# Altium PCB PCB_C70005-A2.PcbDoc (part 3 of 3)
Units mm, origin at the board's own origin, x right, y up, seen from the top; angles counter-clockwise.
Board outline 80.01 x 50.8 mm, 2 copper layers (Top Layer, Bottom Layer); 96 components, 58 nets, 254 pads, 376 vias.
Unrouted connection lines stored in the file: 49.
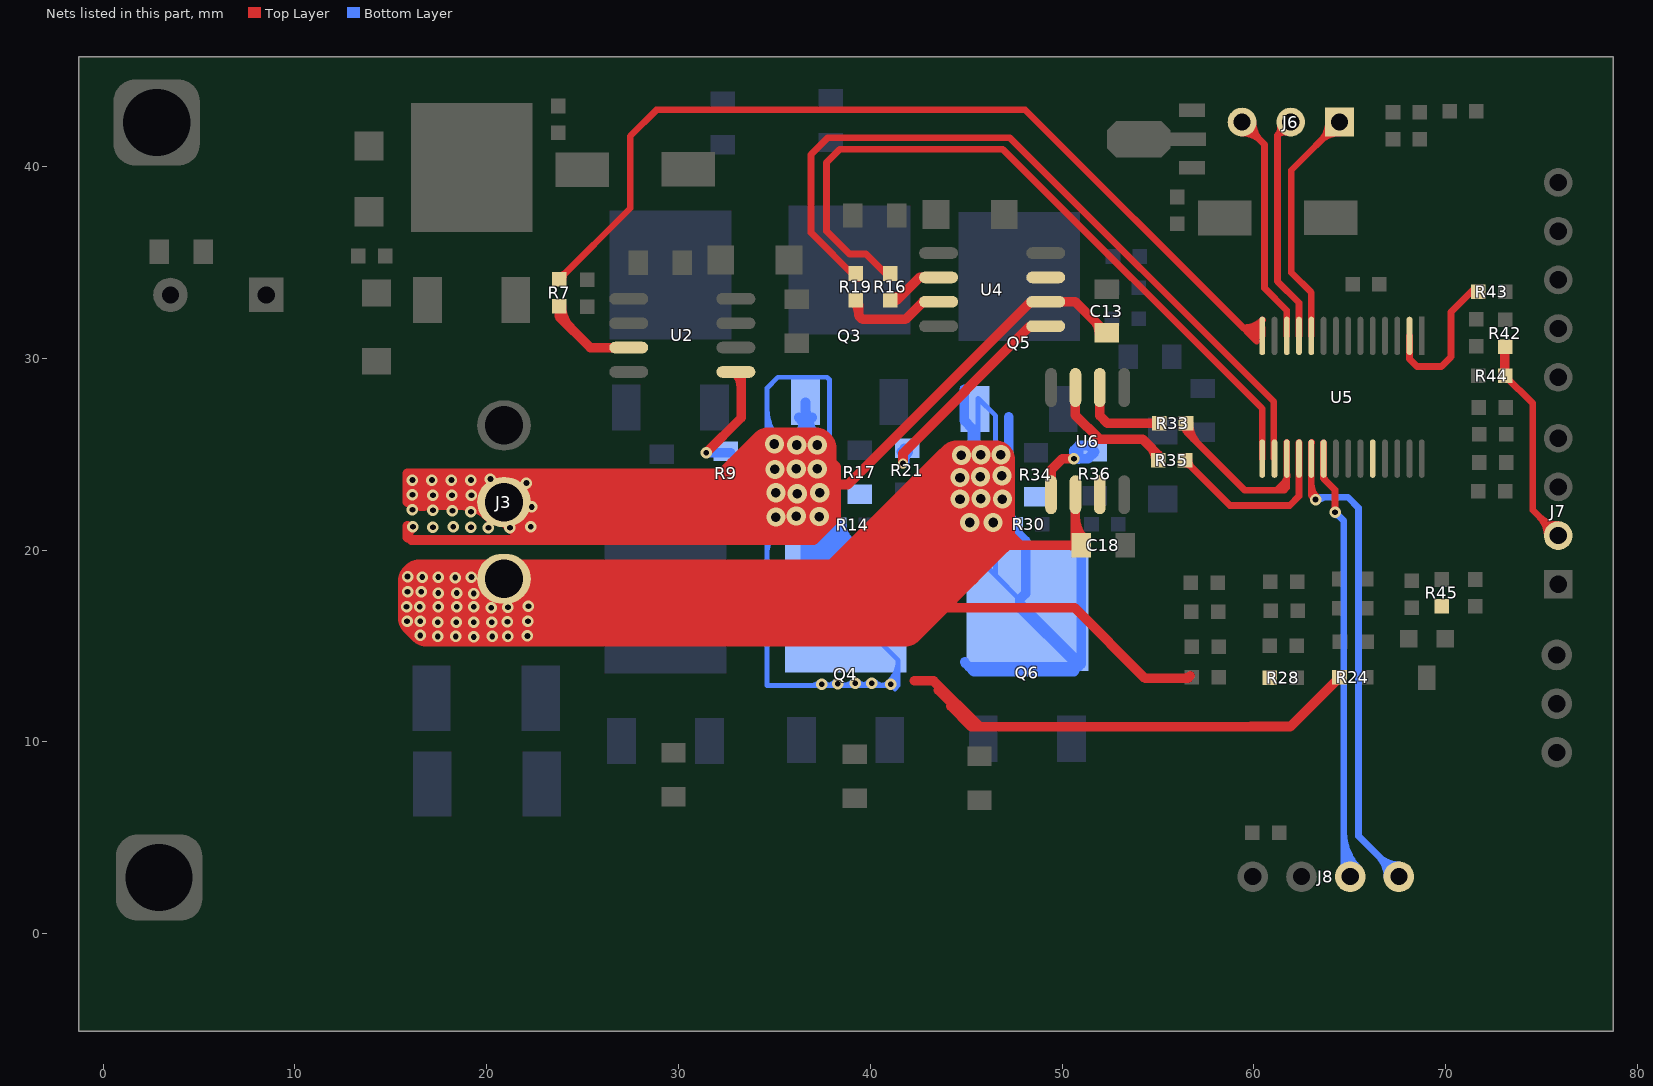
[diagram p3: the nets of this part, all layers, seen from the top]

## Via types
v1: diameter 0.6, hole 0.3, Top Layer to Bottom Layer, 247 vias
v2: diameter 1, hole 0.5, Top Layer to Bottom Layer, 69 vias
v3: diameter 0.5, hole 0.3, Top Layer to Bottom Layer, 60 vias

## Nets (pads, with @x,y where several pads share a name; then routed paths per layer and width w, separated by ;. In a path a pad name is that pad's centre, name@x,y a point inside that pad or via, vN(x,y) a via of type N, cw(c..) or ccw(c..) an arc to the next point about the centre after c; other vN are vias at no path point) (continued)
NetR7_1: R7.1 U5.14 | length 52.2
  Top Layer w0.35: R7.1@23.774,34.112 27.483,37.821 27.483,41.58 28.854,42.951 48.082,42.951 59.436,31.598 ; R7.1@23.774,34.318 ccw(c23.774,34.816) 24.126,34.464 ccw(c24.478,34.112) R7.1@23.98,34.112 ; 59.489,31.598 ccw(c59.489,32.965) U5.14@60.455,31.998 ; 60.12,31.483 59.55,31.483 ; 60.147,30.886 59.868,31.166 ; 60.235,31.369 59.665,31.369 ; U5.14@60.427,31.598 59.436,31.598 ; U5.14@60.438,31.586 U5.14@60.438,31.166 59.868,31.166 ; 59.436,31.598 59.55,31.483 ; 59.55,31.483 59.665,31.369 ; 59.665,31.369 59.868,31.166
NetR7_2: R7.2 U2.3 | length 6.1
  Top Layer w0.5: R7.2@23.774,32.715 23.774,32.182 25.4,30.556 U2.3@27.407,30.556 ; R7.2@23.905,32.715 ccw(c25.509,32.715) 24.375,31.581
NetR9_1: R9.1 U2.5 | length 7.2
  Top Layer w0.5: v1(31.445,25.07) 33.274,26.899 33.274,29.007 U2.5@32.995,29.286 ; U2.5@32.956,29.247 cw(c32.188,28.479) 33.274,28.479
  Bottom Layer w0.5: v1(31.445,25.07) R9.1@32.715,25.07
NetR16_1: R16.1 U5.15 | length 39.1
  Top Layer w0.35: R16.1@41.046,34.163 39.776,35.433 38.913,35.433 37.719,36.627 37.719,40.208 38.405,40.894 46.914,40.894 60.438,27.37 U5.15@60.438,24.766
NetR16_2: R16.2 U4.2 | length 4.2
  Top Layer w0.5: R16.2@41.046,33.151 ccw(c41.046,34.268) 41.836,33.478 ; R16.2@41.313,33.033 41.391,33.033 42.572,34.214 U4.2@43.562,34.214 U4.2@44.146,34.214
NetR17_1: R17.1 U4.7
NetR19_1: R19.1 U5.16 | length 40.7
  Top Layer w0.35: R19.1@39.395,34.188 39.268,34.188 36.906,36.551 36.906,40.615 37.795,41.504 47.269,41.504 61.042,27.731 U5.16@61.042,24.802
NetR19_2: R19.2 U4.3 | length 6.4
  Top Layer w0.5: R19.2@39.15,32.927 cw(c38.559,32.336) 39.395,32.336 ; R19.2@39.395,32.791 39.395,32.233 39.599,32.029 41.834,32.029 42.748,32.944 U4.3@43.561,32.944 U4.3@44.145,32.944
NetR21_1: R21.1 U4.5 | length 14.5
  Top Layer w0.5: v3(41.707,24.511) 41.707,25.044 48.336,31.674 U4.5@49.149,31.674 U4.5@49.733,31.674
  Bottom Layer w0.5: R21.1@41.626,25.116 cw(c41.247,24.737) v3@41.783,24.737 ; v3@41.707,24.505 cw(c42.505,24.505) R21.1@41.979,25.104 ; v3(41.707,24.511) 41.707,25.07 41.783,25.298 v3@41.783,24.562 ; v3@41.783,24.614 cw(c42.493,24.614) R21.1@41.991,25.116
NetR33_1: R33.1 U5.17 | length 12.5
  Top Layer w0.35: R33.1@56.32,26.619 ccw(c57.015,26.619) 56.524,26.128 ; R33.1@56.348,26.449 cw(c56.134,26.134) 56.515,26.134 ; R33.1@56.515,26.391 56.515,26.137 59.538,23.114 61.184,23.114 ; R33.1@56.67,26.619 ccw(c58.21,26.619) 57.121,25.53 ; 61.571,23.5 ccw(c61.155,23.916) U5.17@61.743,23.916 ; U5.17@61.722,25.603 61.718,25.599 U5.17@61.718,24.766 61.718,23.647 ; 61.184,23.114 61.718,23.647 ; 61.184,23.114 61.57,23.114 61.718,23.262 61.718,23.647
NetR33_2: R33.2 U6.2 | length 4.7
  Top Layer w0.5: U6.2@51.968,28.473 51.968,27 52.349,26.619 R33.2@55.067,26.619
NetR34_1: R34.1 U6.7
NetR35_1: R35.1 U5.18 | length 10.7
  Top Layer w0.35: R35.1@56.413,24.483 cw(c56.413,24.047) R35.1@56.722,24.355 ; R35.1@56.413,24.663 58.75,22.327 61.874,22.327 62.358,22.81 U5.18@62.358,24.766 U5.18@62.358,25.602 ; R35.1@56.619,24.689 ccw(c57.178,24.689) 56.783,24.294
NetR35_2: R35.2 U6.3 | length 7.4
  Top Layer w0.5: U6.3@50.698,28.473 50.698,27.026 51.943,25.781 54.204,25.781 R35.2@55.016,24.968 ; 54.595,25.389 cw(c53.895,24.689) R35.2@54.885,24.689
NetR36_1: R36.1 U6.5 | length 6.4
  Top Layer w0.5: U6.5@49.428,22.885 49.428,24.181 50.013,24.765 v1(50.622,24.765)
  Bottom Layer w0.5: v1@50.876,24.74 v1@50.876,24.765 ; v1@50.876,24.765 50.876,25.451 ; v1@50.876,24.765 51.359,24.765 R36.1@51.714,25.121 51.384,25.451 50.876,25.451 ; v1@50.876,24.765 v1(50.622,24.765) 50.622,25.197 50.876,25.451
NetR43_2: R43.2 U5.2 | length 7.8
  Top Layer w0.35: U5.2@68.118,31.166 68.118,29.957 68.504,29.571 69.779,29.571 70.282,30.074 70.282,32.41 R43.2@71.526,33.655
NetR45_1: R45.1 U5.24
OCDSCL: J8.2 U5.20 | length 27.9
  Top Layer w0.35: U5.20@63.613,23.916 ccw(c63.984,23.916) 63.722,23.653 ; U5.20@63.627,25.578 63.638,25.567 U5.20@63.638,24.766 63.638,23.737 64.237,23.138 v1(64.237,21.971) ; v1@64.148,22.059 ccw(c63.935,22.273) 64.237,22.273 ccw(c64.538,22.273) v1@64.325,22.059
  Bottom Layer w0.35: v1@64.237,21.846 cw(c64.237,21.544) 64.45,21.758 cw(c64.663,21.971) v1@64.362,21.971 ; v1(64.237,21.971) 64.694,21.514 64.694,3.302 J8.2@65.024,2.972 ; 64.694,4.433 ccw(c66.485,4.433) J8.2@65.218,3.166 ; 64.694,5.278 ccw(c67.33,5.278) J8.2@65.466,3.414
OCDSDA: J8.1 U5.19 | length 29.9
  Top Layer w0.35: 62.998,23.471 ccw(c64.06,23.471) v1@63.309,22.72 ; U5.19@63.017,25.603 62.998,25.584 U5.19@62.998,24.766 62.998,22.854 v1@63.195,22.657 ; v1@63.096,22.631 ccw(c62.794,22.631) 63.007,22.845 ccw(c63.221,23.058) v1@63.221,22.756
  Bottom Layer w0.35: v1(63.221,22.631) 63.348,22.758 64.897,22.758 65.456,22.2 65.456,5.08 J8.1@67.564,2.972 ; v1@63.309,22.543 cw(c63.829,22.023) 63.829,22.758 ; J8.1@66.939,2.972 ccw(c65.43,2.972) 66.497,4.039 ccw(c67.564,5.106) J8.1@67.564,3.597
PB0: J6.3 U5.12 | length 14.3
  Top Layer w0.35: J6.3@59.385,41.741 cw(c59.385,40.353) 60.367,41.335 cw(c61.348,42.316) J6.3@59.96,42.316 ; J6.3@59.385,42.316 60.554,41.148 60.554,33.655 61.718,32.491 U5.12@61.718,31.166
PB1: J6.1 U5.10 | length 14.8
  Top Layer w0.35: U5.10@62.998,31.166 62.998,33.421 61.951,34.468 61.951,39.802 J6.1@64.465,42.316 ; J6.1@63.89,42.316 cw(c62.502,42.316) 63.484,41.335 cw(c64.465,40.353) J6.1@64.465,41.741
PB2: J6.2 U5.11 | length 13
  Top Layer w0.35: J6.2@61.373,42.155 cw(c60.864,42.006) 61.239,41.631 ; J6.2@61.764,41.765 ccw(c61.614,41.256) 61.239,41.631 ; J6.2@61.925,42.316 61.239,41.631 ; U5.11@62.358,31.166 62.358,32.892 61.239,34.011 61.239,41.631
V: C13.2 J3.2 Q3.3 Q4.2 R14.1 R24.1 U4.6 | length 681.6
  Top Layer w0.5: 36.906,23.419 37.236,23.419 38.202,23.419 ; 38.227,23.419 38.837,23.419 48.362,32.944 U4.6@49.149,32.944 50.698,32.944 C13.2@52.324,31.318 ; 44.196,11.862 45.263,10.795 45.457,10.795 45.696,10.795 59.842,10.795 ; 44.602,11.811 44.679,11.811 ; 51.667,31.975 cw(c51.01,31.318) C13.2@51.939,31.318
  Top Layer w0.508: 15.875,20.651 cw(c16.469,20.651) v1@16.177,21.169 ; v1@15.875,21.26 15.875,20.726 16.078,20.523 35.916,20.523 ; 15.875,22.508 cw(c16.217,22.508) v1@16.139,22.841 ; 15.875,22.606 15.875,23.825 ; v1@15.875,22.925 cw(c16.853,22.925) v1@16.162,23.616 ; v1@15.875,23.61 ccw(c16.853,23.61) v1@16.162,22.918 ; v1@16.137,23.694 cw(c16.188,24.003) 15.875,24.003 ; v1@16.154,23.611 cw(c16.447,23.17) 16.552,23.689 ; 16.179,24.003 cw(c16.179,22.683) 17.112,23.616 ccw(c16.608,23.112) 16.608,23.825 ; 16.61,23.908 cw(c16.513,23.162) v1@17.109,23.621 ; 16.666,23.825 ccw(c16.666,23.112) v1@16.162,23.616 ; 16.857,24.003 cw(c16.857,19.711) J3.2@20.361,22.189 ; v1@16.93,23.825 cw(c16.93,19.413) J3.2@20.379,22.165 ; 17.095,24.003 ccw(c17.095,22.683) v1@16.162,23.616 ; v1@17.16,23.606 cw(c17.395,22.948) 17.694,23.579 ; v1@17.169,23.61 cw(c17.446,23.161) 17.567,23.674 ; 17.195,24.003 cw(c17.195,22.683) 18.128,23.616 ccw(c17.624,23.112) 17.624,23.825 ; v1@17.284,23.568 ccw(c17.565,24.659) v1@18.138,23.689 ; v1@17.392,23.555 cw(c16.907,22.289) v1@18.144,22.841 ; 17.584,23.628 ccw(c17.787,24.329) v1@18.139,23.689 ; 17.682,23.825 ccw(c17.682,23.112) 17.178,23.616 cw(c18.111,22.683) 18.111,24.003 ; 17.72,23.868 cw(c17.624,23.257) v1@18.124,23.622 ; 17.838,24.003 cw(c17.838,20.405) J3.2@20.776,22.483 ; v1@17.985,23.825 cw(c17.985,20.255) J3.2@20.777,22.481 ; v1@18.149,23.582 ccw(c18.523,24.849) v1@19.155,23.689 ; v1@18.165,22.901 ccw(c17.993,23.238) v1@18.332,23.408 ; v1@18.173,23.605 cw(c18.317,23.063) 18.598,23.548 ; v1@18.179,23.607 cw(c18.739,22.275) v1@19.285,23.613 ; v1@18.184,23.609 cw(c18.453,23.144) 18.592,23.663 ; v1@18.192,22.814 cw(c18.37,21.371) 19.265,22.517 ; v1@18.206,23.659 ccw(c19.39,23.925) 18.741,22.9 ; v1@18.207,23.655 ccw(c18.895,23.753) 18.477,23.197 ; 18.211,24.003 cw(c18.211,22.683) 19.144,23.616 ccw(c18.64,23.112) 18.64,23.825 ; v1@18.377,23.64 ccw(c18.707,24.606) v1@19.157,23.69 ; 18.503,23.605 cw(c17.914,22.433) v1@19.159,22.846 ; 18.598,23.412 cw(c18.192,22.449) v1@19.16,22.843 ; 18.655,22.957 ccw(c18.986,23.576) v1@19.189,22.904 ; 18.698,23.825 ccw(c18.698,23.112) 18.194,23.616 cw(c19.127,22.683) 19.127,24.003 ; 18.776,22.705 ccw(c18.844,23.066) v1@19.162,22.883 ; 18.82,24.003 cw(c18.82,21.099) J3.2@21.19,22.776 ; 18.852,22.951 ccw(c19.078,23.336) v1@19.191,22.905 ; 18.866,23.804 cw(c18.784,23.384) v1@19.139,23.623 ; v1@19.04,23.825 cw(c19.04,21.096) J3.2@21.174,22.798 ; v1@19.184,23.603 cw(c19.237,23.23) 19.464,23.532 ; v1@19.191,23.605 cw(c19.6,22.282) J3.2@20.246,23.507 ; v1@19.2,23.609 cw(c19.486,23.114) 19.634,23.666 ; v1@19.202,22.814 cw(c19.177,21.448) J3.2@20.16,22.397 ; v1@19.204,22.814 cw(c19.25,21.732) J3.2@19.983,22.529 ; v1@19.223,23.652 ccw(c20.288,23.721) J3.2@19.584,22.919 ; v1@19.223,23.656 ccw(c20.671,23.868) J3.2@19.797,22.694 ; v1@19.244,22.841 ccw(c19.526,22.715) 19.357,22.457 ; v1@19.248,22.858 ccw(c19.682,22.836) 19.36,22.544 ; v1@19.248,22.86 ccw(c19.946,22.864) 19.456,22.368 ; 19.346,24.003 cw(c19.346,22.851) 20.16,23.666 ccw(c19.775,23.281) 19.775,23.825 ; v1@19.457,23.739 cw(c19.75,23.149) v1@20.164,23.662 ; 19.714,23.825 ccw(c19.714,23.112) 19.21,23.616 cw(c20.143,22.683) 20.143,24.003 ; 19.757,23.665 ccw(c19.876,24.198) v1@20.168,23.737 ; 19.801,24.003 cw(c19.801,21.794) J3.2@21.605,23.069 ; J3.2@19.946,21.896 ccw(c15.875,19.017) 15.875,24.003 ; J3.2@19.982,21.848 ccw(c15.875,18.571) 15.875,23.825 ; v1@20.096,23.825 cw(c20.096,21.938) J3.2@21.571,23.115 ; v1@20.203,23.653 cw(c20.397,22.749) J3.2@20.899,23.526 ; J3.2@20.216,23.658 cw(c20.438,23.274) J3.2@20.553,23.703 ; v1@20.239,23.704 ccw(c20.683,23.756) J3.2@20.406,23.405 ; J3.2@20.303,23.197 cw(c22.248,21.252) 22.248,24.003 ; 20.611,23.825 ccw(c20.611,23.281) 20.226,23.666 cw(c21.04,22.851) 21.04,24.003 ; J3.2@20.662,22.838 cw(c23.475,20.025) 23.475,24.003 ; 20.735,24.003 cw(c20.735,22.158) 22.04,23.462 ccw(c21.164,22.587) 21.164,23.825 ; J3.2@21.021,22.479 cw(c24.701,18.799) 24.701,24.003 ; J3.2@21.38,22.12 cw(c25.927,17.573) 25.927,24.003 ; J3.2@21.389,23.319 cw(c21.884,22.571) v1@22.063,23.45 ; J3.2@21.74,21.76 cw(c27.154,16.346) 27.154,24.003 ; J3.2@21.756,23.038 ccw(c21.332,23.596) v1@22.027,23.501 ; v1@22.092,23.537 ccw(c22.402,24.188) 22.643,23.508 ; v1@22.105,23.462 cw(c23.41,22.158) 23.41,24.003 ; v1@22.111,23.469 cw(c22.858,22.965) 22.686,23.85 ; 22.555,23.076 21.806,23.825 15.875,23.825 ; 33.21,23.939 33.147,24.003 18.161,24.003 15.875,24.003 ; 36.146,20.754 35.916,20.523 ; v2@37.14,21.597 cw(c36.475,21.107) 37.059,20.523 ; v2@37.16,25.4 37.236,25.324 38.227,24.333 38.227,23.419 38.227,21.692 37.059,20.523 ; 37.477,20.941 ccw(c36.956,21.462) v2@37.549,21.898 ; v2@37.482,25.476 ccw(c38.444,25.476) 37.764,24.796 ; 42.291,13.183 43.309,13.183 45.696,10.795 ; 43.561,12.691 45.457,10.795 ; 59.842,10.795 61.9,10.795 R24.1@64.465,13.36 ; 15.875,23.825 15.875,24.003 ; 35.916,20.523 37.059,20.523
  Top Layer w2: 16.637,23.038 16.675,23.076 17.145,23.076 J3.2@21.476,23.076 ; 18.685,23.076 cw(c18.685,20.385) J3.2@20.588,22.288 ; J3.2@21.212,22.288 cw(c23.115,20.385) 23.115,23.076 ; J3.2@21.212,22.712 ccw(c23.676,25.176) 23.676,21.692 ; 32.194,22.771 32.499,23.076 ; 33.157,21.692 ccw(c33.157,24.907) 35.431,22.633 ; 33.235,23.964 cw(c35.027,22.173) 35.027,24.706 ccw(c35.027,22.541) 33.495,24.072 ; 33.985,23.939 cw(c33.985,21.895) 35.431,23.341 ; 34.061,22.936 33.922,23.076 ; 34.193,23.076 cw(c34.193,19.817) 36.498,22.121 ; 34.519,25.095 33.363,23.939 ; 34.561,23.076 ccw(c34.561,25.815) 36.498,23.878 ; 34.582,21.784 cw(c35.125,21.711) 34.792,22.146 ; 34.644,21.967 cw(c36.563,20.861) v2@36.563,23.076 ; 34.673,23.853 ccw(c36.548,25.728) v2@36.548,23.076 ; 34.673,24.56 cw(c36.702,22.531) 36.702,25.4 ; 34.724,22.633 ccw(c36.998,24.907) v2@36.998,21.692 ; v2@34.98,23.939 cw(c34.98,21.721) 36.549,23.29 ; 35.057,22.487 ccw(c35.139,24.5) v2@36.563,23.076 ; 35.363,22.146 cw(c35.03,21.711) 35.573,21.784 ; 35.449,23.322 cw(c34.596,22.554) 35.408,21.742 v2@35.357,21.692 ; 35.457,23.952 cw(c33.922,24.859) 33.922,23.076 ; 35.482,23.281 cw(c34.489,22.559) v2@35.357,21.692 ; 35.556,21.861 ccw(c33.922,21.369) 33.922,23.076 ; 35.647,24.176 ccw(c36.152,24.232) 35.835,23.836 ; 35.655,24.129 ccw(c36.372,24.28) 35.972,23.666 ; 35.685,24.43 cw(c37.16,23.794) v2@37.16,25.4 ; 35.703,22.849 ccw(c37.084,23.095) v2@37.084,21.692 ; 35.732,23.949 ccw(c36.148,24.234) 36.055,23.738 ; 36.417,23.813 ccw(c35.433,25.324) 37.236,25.324 v2(37.236,24.232) ; 36.417,24.651 cw(c35.433,23.139) v2@37.236,23.139 ; 36.498,21.414 ccw(c34.715,23.197) v2@37.236,23.197 ; 36.52,24.561 ccw(c34.671,22.942) v2@34.671,25.4 ; 36.546,22.58 ccw(c34.916,24.232) v2(37.236,24.232) ; 36.549,22.583 ccw(c35.685,23.446) 36.906,23.446 ; 36.608,23.218 ccw(c35.243,22.287) 35.243,23.939 33.363,23.939 ; v2@36.609,23.121 cw(c35.077,24.653) 35.077,22.487 ; 36.692,22.877 cw(c35.357,23.036) v2@35.357,21.692 ; 36.699,23.212 cw(c37.363,22.548) 37.363,23.487 ; 36.741,24.167 cw(c38.203,24.357) v2@37.16,25.4 ; 36.742,25.402 ccw(c37.261,25.48) 36.949,25.058 ; 36.868,23.057 cw(c37.618,22.951) 37.162,23.556 ; 36.906,23.599 ccw(c35.512,23.599) 36.498,24.585 cw(c34.715,22.802) v2@37.236,22.802 ; 36.906,24.638 36.906,23.419 v2@36.563,23.076 ; 36.933,23.241 cw(c37.406,22.962) 37.268,23.494 ; J3.2@20.9,22.5 31.136,22.5 ; J3.2@20.9,22.5 J3.2@21.476,23.076 ; J3.2@20.9,22.5 21.708,21.692 v2@35.357,21.692 ; J3.2@21.476,23.076 22.073,23.076 22.555,23.076 ; 22.555,23.076 ccw(c22.555,21.557) 21.257,22.344 cw(c22.555,21.557) 22.555,23.076 ; 22.555,23.076 31.712,23.076 ; 31.136,22.5 31.712,23.076 ; 31.136,22.5 31.771,22.5 32.347,23.076 ; 31.712,23.076 32.347,23.076 ; 32.347,23.076 33.21,23.939 ; 32.347,23.076 32.499,23.076 ; 32.499,23.076 33.922,23.076 ; 32.499,23.076 33.21,23.787 ; 33.21,23.787 33.21,23.939 ; 33.21,23.787 33.922,23.076 ; 33.21,23.787 33.363,23.939 ; 33.21,23.939 v2@34.671,25.4 ; 33.21,23.939 33.363,23.939 ; 33.922,23.076 v2@36.563,23.076 ; 34.11,22.888 ccw(c35.077,23.855) 35.077,22.487 ; 34.11,22.888 ccw(c35.077,23.855) 35.077,22.487 ; 34.11,22.888 ccw(c35.077,23.855) 35.077,22.487 ; 34.11,22.888 ccw(c35.077,23.855) 35.077,22.487 ; v2@34.671,25.4 36.144,25.4 v2@37.16,25.4 ; v2@35.357,21.692 v2@37.084,21.692 ; v2@37.084,21.692 37.236,21.844 37.236,23.419 v2(37.236,24.232) ; 35.644,21.768 cw(c36.583,21.768) 35.919,22.432 ccw(c36.583,21.768) 35.644,21.768 ; 35.784,22.118 cw(c36.144,21.758) 36.144,22.268 ccw(c36.144,21.758) 35.784,22.118 ; 36.144,21.268 ccw(c36.144,22.514) 37.025,21.633 cw(c36.144,22.514) 36.144,21.268 ; 36.17,24.976 ccw(c36.17,26.345) 37.137,25.377 cw(c36.17,26.345) 36.17,24.976 ; 36.485,24.597 cw(c34.875,22.87) 37.236,22.87 ccw(c34.875,22.87) 36.485,24.597 ; 36.784,22.991 cw(c37.467,22.808) 37.113,23.42 ccw(c37.467,22.808) 36.784,22.991
  Bottom Layer w0.254: 34.62,19.713 cw(c37.082,19.713) v2@35.341,21.453 ; 34.62,20.326 cw(c36.468,20.326) v2@35.162,21.633 ; 34.62,20.939 cw(c35.855,20.939) v2@34.982,21.812 ; 34.62,20.983 cw(c37.082,20.983) v2@35.341,22.723 ; v2@34.62,21.596 cw(c36.468,21.596) v2@35.162,22.903 ; 34.62,22.209 cw(c35.855,22.209) v2@34.982,23.082 ; 34.62,22.325 cw(c36.908,22.325) v2@35.29,23.942 ; 34.62,22.495 ccw(c35.855,22.495) v2@34.982,21.622 ; v2@34.62,22.938 cw(c36.295,22.938) v2@35.111,24.122 ; v2@34.62,23.108 ccw(c36.468,23.108) v2@35.162,21.801 ; 34.62,23.551 cw(c35.682,23.551) v2@34.931,24.302 ; 34.62,23.707 cw(c36.822,23.707) v2@35.265,25.263 ; 34.62,23.721 ccw(c37.082,23.721) v2@35.341,21.981 ; 34.62,23.765 ccw(c35.855,23.765) v2@34.982,22.892 ; v2@34.62,24.32 cw(c36.208,24.32) v2@35.085,25.443 ; v2@34.62,24.378 ccw(c36.468,24.378) v2@35.162,23.071 ; 34.62,24.861 ccw(c35.682,24.861) v2@34.931,24.111 ; 34.62,24.933 cw(c35.595,24.933) v2@34.906,25.622 ; 34.62,24.991 ccw(c37.082,24.991) v2@35.341,23.251 ; v2@34.62,25.475 ccw(c36.295,25.475) v2@35.111,24.29 ; 34.62,26.088 ccw(c36.908,26.088) v2@35.29,24.47 ; 34.62,26.121 ccw(c35.595,26.121) v2@34.906,25.432 ; 34.62,26.734 ccw(c36.208,26.734) v2@35.085,25.611 ; 34.62,27.347 ccw(c36.822,27.347) v2@35.265,25.791 ; 34.65,22.521 cw(c35.517,22.389) v2@34.997,23.096 ; 34.667,21.284 cw(c35.486,21.156) v2@34.998,21.826 ; 35.059,23.56 ccw(c35.371,23.371) v2@35.15,23.082 ; 35.095,22.32 ccw(c35.452,22.102) v2@35.16,21.802 ; v2@35.206,23.802 ccw(c35.544,23.598) v2@35.304,23.283 ; v2@35.261,22.592 ccw(c35.68,22.336) v2@35.338,21.984 ; v2@36.202,23.055 ccw(c36.248,23.884) 36.835,23.297 ; v2@36.206,23.055 ccw(c36.259,23.653) 36.779,23.353 ; v2@36.216,23.309 ccw(c36.291,24.644) 37.236,23.698 ; Q4.2@36.745,19.149 ccw(c34.033,21.862) 37.869,21.862 ; Q4.2@36.772,19.517 ccw(c36.04,20.399) 37.186,20.399 ; 36.863,12.929 ccw(c36.863,13.606) v1@37.343,13.127 ; v2@36.88,24.12 cw(c35.902,23.814) 36.627,23.089 37.236,23.698 ; 36.924,23.385 ccw(c36.354,23.955) v2@37.123,24.196 ; Q4.2@36.925,18.97 ccw(c34.646,21.249) 37.869,21.249 ; v2@36.973,24.495 ccw(c36.336,25.132) 37.236,25.132 ccw(c38.137,25.132) v2@37.5,24.495 ; v2@36.973,25.212 cw(c36.336,24.576) 37.236,24.576 cw(c38.137,24.576) v2@37.5,25.212 ; v2@37.029,25.166 cw(c36.859,24.91) 37.156,24.831 cw(c37.638,24.702) v2@37.408,25.145 ; v2@37.036,21.961 ccw(c36.27,22.514) v2@37.2,22.681 ; v2@37.044,21.972 ccw(c36.514,22.386) 37.181,22.468 ; v2@37.065,25.145 cw(c36.834,24.702) 37.317,24.831 cw(c37.614,24.91) v2@37.443,25.166 ; v2@37.07,22.001 ccw(c36.524,22.528) v2@37.26,22.713 ; v2@37.074,21.479 cw(c36.805,21.21) 37.186,21.21 ; v2@37.074,22.006 ccw(c36.805,22.275) 37.186,22.275 ; v2@37.082,21.471 cw(c35.362,19.647) Q4.2@37.869,19.647 ; v2@37.096,22.026 ccw(c36.812,22.36) v2@37.181,22.596 ; v2@37.1,23.251 ccw(c35.243,25.108) 37.869,25.108 ; Q4.2@37.105,18.79 ccw(c35.26,20.635) 37.869,20.635 ; v2@37.108,23.881 cw(c37.042,23.698) 37.236,23.698 ; v2@37.145,21.423 cw(c36.925,21.061) 37.337,21.162 ; v2@37.152,21.419 cw(c36.792,20.797) 37.486,20.983 ; v2@37.165,22.671 cw(c36.96,22.344) 37.336,22.43 ; 37.186,20.466 ccw(c39.57,20.466) Q4.2@38.975,18.158 ; 37.186,20.474 cw(c38.606,20.474) v2@37.602,21.479 ; 37.186,20.794 ccw(c39.654,20.794) Q4.2@39.038,18.404 ; 37.186,20.826 cw(c35.069,20.826) 36.566,19.329 ccw(c33.42,22.475) 37.869,22.475 ; 37.186,21.087 cw(c37.993,21.087) v2@37.422,21.658 ; 37.186,21.122 ccw(c39.739,21.122) Q4.2@39.101,18.65 ; v2@37.186,21.45 ccw(c39.823,21.45) Q4.2@39.165,18.896 ; v2@37.186,21.657 cw(c38.693,21.657) v2@37.627,22.723 ; v2@37.186,21.777 ccw(c39.908,21.777) Q4.2@39.228,19.141 ; v2@37.186,22.105 ccw(c39.992,22.105) Q4.2@39.292,19.387 ; 37.186,22.27 cw(c38.08,22.27) v2@37.448,22.903 ; 37.186,22.398 ccw(c37.993,22.398) v2@37.422,21.827 ; 37.186,22.433 ccw(c40.077,22.433) Q4.2@39.355,19.633 ; 37.186,22.516 ccw(c36.892,22.516) 37.1,22.723 cw(c35.243,20.866) 37.869,20.866 ; v2@37.186,22.761 ccw(c40.161,22.761) Q4.2@39.418,19.879 ; v2@37.186,23.011 ccw(c38.606,23.011) v2@37.602,22.006 ; v2@37.197,22.088 ccw(c36.787,23.089) 37.869,23.089 ; 37.22,23.682 ccw(c36.805,24.097) v2@37.365,24.272 ; v2@37.222,21.388 cw(c37.009,20.74) 37.618,21.048 ; v2@37.221,22.563 ccw(c38.007,22.704) v2@37.551,22.049 ; v2@37.238,25.849 ccw(c37.243,26.735) 37.869,26.109 ; v2@37.252,21.825 ccw(c36.912,22.154) 37.371,22.269 ; v2@37.256,21.656 cw(c35.917,20.236) Q4.2@37.869,20.236 ; v2@37.26,21.378 cw(c37.059,20.434) 37.869,20.959 ; v2@37.261,21.833 ccw(c37.003,22.136) 37.338,22.35 ; 37.264,22.319 cw(c37.529,22.366) v2@37.46,22.627 ; 37.267,21.013 cw(c37.606,21.077) v2@37.477,21.396 ; v2@37.279,22.903 cw(c35.856,21.48) 37.869,21.48 ; v2@37.279,23.071 ccw(c35.856,24.494) 37.869,24.494 ; v2@37.293,21.853 ccw(c36.942,22.71) 37.869,22.71 ; v2@37.299,21.371 cw(c37.165,20.074) 38.177,20.896 ; 37.318,21.238 cw(c37.771,21.349) v2@37.426,21.662 ; v2@37.326,21.624 cw(c37.254,20.937) 37.791,21.372 ; v2@37.364,23.881 ccw(c37.431,23.698) 37.236,23.698 ; 37.368,22.28 ccw(c37.711,22.366) v2@37.53,22.062 ; v2@37.389,21.617 ccw(c37.097,22.332) 37.869,22.332 ; v2@37.415,21.853 cw(c36.881,21.087) 37.8,21.251 ; v2@37.421,22.06 cw(c38.094,22.214) v2@37.62,22.716 ; v2@37.423,21.638 ccw(c36.645,22.589) 37.868,22.467 ; v2@37.431,21.841 cw(c36.473,20.825) 37.869,20.825 ; 37.432,20.775 cw(c38.196,20.962) v2@37.614,21.491 ; 37.436,22.467 ccw(c38.092,22.443) v2@37.611,21.996 ; v2@37.455,21.388 cw(c37.599,20.951) 37.888,21.31 cw(c38.191,21.684) v2@37.71,21.717 ; v2@37.459,22.892 ccw(c36.469,23.881) 37.869,23.881 ; v2@37.459,23.082 cw(c36.469,22.093) 37.869,22.093 ; v2@37.465,21.755 ccw(c38,22.146) R14.1@38.274,21.542 ; v2@37.485,21.382 ccw(c37.252,21.954) 37.869,21.954 ; 37.538,20.791 cw(c38.45,21.036) v2@37.653,21.542 ; v2@37.565,22.058 cw(c37.149,21.479) 37.855,21.58 ; v1@37.587,13.127 ccw(c38.067,13.606) v1@38.067,12.929 ; v2@37.605,22.025 cw(c37.028,21.414) 37.869,21.414 ; v2@37.609,25.478 cw(c38.495,25.482) 37.869,26.109 ; v1@37.624,13.074 ccw(c37.779,13.142) 37.823,12.978 ; v2@37.638,22.712 ccw(c37.082,23.268) 37.869,23.268 ; v2@37.638,23.262 cw(c37.082,22.706) 37.869,22.706 ; v1@37.64,12.929 ccw(c37.64,13.693) v1@38.181,13.153 ; v2@37.649,21.503 ccw(c38.132,21.856) R14.1@38.379,21.311 ; v2@37.674,23.193 ccw(c37.869,23.322) 37.869,23.089 ; v2@37.692,21.626 ccw(c38.755,21.277) 37.757,20.772 ; v2@37.703,21.665 ccw(c38.52,21.49) 37.819,21.035 ; v2@37.709,21.704 ccw(c38.203,21.652) 37.817,21.339 ; v2@37.736,22.964 cw(c37.869,22.955) 37.869,23.089 ; 37.759,21.256 ccw(c37.611,21.427) 37.836,21.411 ; 37.779,22.21 cw(c37.583,22.002) 37.869,22.002 ; 37.833,21.251 ccw(c38.264,21.565) R14.1@38.484,21.079 ; 37.869,20.392 ccw(c40.1,20.392) Q4.2@39.221,18.341 ; 37.869,20.777 ccw(c40.265,20.777) Q4.2@39.321,18.575 ; 37.869,21.162 ccw(c40.43,21.162) Q4.2@39.421,18.808 ; 37.869,21.548 ccw(c40.595,21.548) Q4.2@39.521,19.042 ; 37.869,21.933 ccw(c40.76,21.933) Q4.2@39.621,19.275 ; 37.869,22.318 ccw(c40.926,22.318) Q4.2@39.721,19.508 ; 37.869,22.703 ccw(c41.091,22.703) Q4.2@39.822,19.742 ; 37.913,21.6 ccw(c38.675,21.74) R14.1@38.235,21.101 ; 37.917,21.981 ccw(c38.957,22.204) R14.1@38.379,21.311 ; 37.923,22.284 ccw(c39.123,22.611) R14.1@38.505,21.531 ; R14.1@38.024,20.997 ccw(c38.183,21.026) 38.091,20.892 ; Q4.2@38.052,20.148 cw(c37.847,21.06) 37.186,20.399 ; 38.084,21.692 ccw(c38.693,21.858) R14.1@38.379,21.311 ; R14.1@38.146,21.411 ccw(c37.592,21.65) 38.153,21.873 ; 38.148,21.886 ccw(c38.727,22.115) R14.1@38.48,21.544 ; R14.1@38.156,21.432 ccw(c38.619,21.18) 38.291,20.768 ; 38.353,20.75 cw(c38.778,21.011) R14.1@38.379,21.311 ; R14.1@38.367,21.057 cw(c38.34,20.472) 38.773,20.866 ; v1@38.426,13.153 ccw(c38.966,13.693) v1@38.966,12.929 ; v1@38.467,13.086 ccw(c38.628,13.141) 38.672,12.977 ; 38.479,20.908 cw(c38.915,21.23) R14.1@38.379,21.311 ; v1@38.493,12.929 ccw(c38.493,13.78) v1@39.095,13.178 ; 38.528,20.58 cw(c38.889,21.034) R14.1@38.379,21.311 ; 38.549,20.433 cw(c39.097,20.771) R14.1@38.582,21.158 ; R14.1@38.603,21.189 ccw(c39.159,20.887) 38.765,20.392 ; R14.1@38.631,21.273 ccw(c39.772,21.101) 38.844,20.415 ; R14.1@38.633,21.299 ccw(c39.274,21.268) 38.799,20.837 ; Q4.2@38.721,16.984 Q4.2@41.453,14.252 ; v1@39.34,13.178 ccw(c39.942,13.78) v1@39.942,12.929 ; v1@39.357,12.929 ccw(c39.357,13.78) v1@39.959,13.178 ; Q4.2@39.482,20.125 cw(c40.246,23.088) v2@37.186,23.088 ; Q4.2@39.922,19.975 cw(c41.256,23.088) 37.869,23.088 ; Q4.2@40.169,17.416 Q4.2@37.869,19.716 ; v1@40.204,13.178 ccw(c40.805,13.78) v1@40.805,12.929 ; 40.47,12.929 ccw(c40.47,13.606) v1@40.949,13.127 ; v1@40.956,13.133 ccw(c39.945,14.252) Q4.2@41.453,14.252 ; v1@41.126,12.945 ccw(c40.462,13.68) Q4.2@41.453,13.68 ; v1@41.23,13.074 ccw(c41.453,13.171) 41.453,12.929 ; 41.296,12.756 ccw(c40.978,13.108) 41.453,13.108 ; 37.186,20.399 v2@37.186,23.089 ; 37.186,20.399 Q4.2@37.869,19.716 ; v2@37.186,23.089 37.869,23.089 ; 37.236,23.698 v2(37.236,24.232) v2(37.236,25.476) 37.869,26.109 ; Q4.2@37.869,19.716 37.869,23.089 ; 37.869,23.089 37.869,26.109 ; 37.869,26.109 37.869,28.882 37.744,29.007 35.179,29.007 34.62,28.448 34.62,12.929 41.453,12.929 ; 41.453,12.929 Q4.2@41.453,14.252
  Bottom Layer w0.508: v2@35.97,21.594 cw(c34.391,20.015) Q4.2@36.624,20.015 ; v2@35.97,21.942 ccw(c34.391,23.521) 36.624,23.521 ; v2@35.97,24.058 cw(c34.391,22.479) 36.624,22.479 ; v2@35.97,24.406 ccw(c34.391,25.984) 36.624,25.984 ; v2@35.996,25.302 cw(c34.478,23.785) 36.624,23.785 ; v2@35.996,25.65 ccw(c34.478,27.168) Q3.3@36.624,27.168 ; v2@36.021,21.981 ccw(c35.106,23.566) 36.874,23.092 ; v2@36.021,22.762 cw(c34.565,21.306) 36.624,21.306 ; v2@36.021,23.11 ccw(c34.565,24.566) 36.624,24.566 ; v2@36.021,24.019 cw(c35.009,22.265) v2@36.965,22.789 ; v2@36.021,24.445 ccw(c35.109,26.024) v2@36.871,25.552 ; v2@36.212,23.979 ccw(c35.87,25.248) 37.076,24.724 ; Q3.3@36.273,26.911 cw(c35.427,26.064) 36.624,26.064 cw(c37.822,26.064) Q3.3@36.975,26.911 ; v2@36.275,21.541 ccw(c35.83,22.313) 36.69,22.082 ; v2@36.274,22.687 ccw(c35.881,23.923) v2@37.034,23.328 ; v2@36.329,21.583 ccw(c35.618,22.294) 36.624,22.294 ; v2@36.329,21.953 cw(c35.618,21.242) 36.624,21.242 ; v2@36.329,24.046 ccw(c35.618,24.758) 36.624,24.758 ; v2@36.329,24.417 cw(c35.618,23.705) 36.624,23.705 ; v2@36.34,24.405 cw(c35.46,23.626) 36.633,23.554 ; v2@36.355,25.291 ccw(c35.705,25.941) 36.624,25.941 ; v2@36.355,25.661 cw(c35.705,25.011) 36.624,25.011 ; v2@36.38,22.751 ccw(c35.791,23.34) 36.624,23.34 ; v2@36.38,23.121 cw(c35.791,22.533) 36.624,22.533 ; v2@36.395,23.105 cw(c35.595,22.428) 36.639,22.341 ; Q4.2@36.624,19.425 cw(c39.655,19.425) v2@37.512,21.568 ; 36.624,20.609 cw(c39.742,20.609) v2@37.537,22.813 ; 36.624,20.652 cw(c38.429,20.652) v2@37.153,21.928 ; v2@36.624,21.835 cw(c38.515,21.835) v2@37.178,23.172 ; 36.624,22.16 cw(c39.308,22.16) v2@37.41,24.058 ; v2@36.624,22.833 ccw(c38.429,22.833) v2@37.153,21.557 ; 36.624,23.386 cw(c38.082,23.386) v2@37.051,24.417 ; 36.624,23.404 cw(c39.308,23.404) v2@37.41,25.302 ; 36.624,24.06 ccw(c39.655,24.06) v2@37.512,21.916 ; v2@36.624,24.139 ccw(c38.515,24.139) v2@37.178,22.802 ; 36.624,24.631 cw(c38.082,24.631) v2@37.051,25.661 ; 36.624,25.077 ccw(c38.082,25.077) v2@37.051,24.046 ; v2@36.624,25.365 ccw(c39.742,25.365) v2@37.537,23.161 ; 36.624,26.303 ccw(c39.308,26.303) v2@37.41,24.406 ; 36.624,26.322 ccw(c38.082,26.322) v2@37.051,25.291 ; Q3.3@36.624,27.548 ccw(c39.308,27.548) v2@37.41,25.65 ; Q3.3@36.624,27.711 36.624,19.081 Q4.2@38.721,16.984 ; 36.647,23.974 ccw(c35.876,23.767) 36.275,24.458 cw(c35.841,23.706) 36.68,23.931 ; 36.704,22.491 cw(c37.834,22.22) v2@37.227,23.21 ; 36.728,25.796 ccw(c37.56,25.966) v2@37.092,25.258 ; v2@36.815,24.118 cw(c35.274,24.531) 36.072,23.149 ccw(c35.266,24.545) v2@36.823,24.128 ; 36.819,21.435 cw(c37.649,21.24) v2@37.2,21.965 ; 36.983,25.038 cw(c37.385,25.31) v2@37.062,25.672 ; 37.099,22.205 ccw(c37.506,21.912) v2@37.154,21.556 ; v2@37.308,24.557 cw(c37.774,24.872) v2@37.4,25.292 ; v2@37.447,22.687 ccw(c37.929,22.34) v2@37.511,21.917
  other v1: 37.465,13.005 41.072,13.005 38.303,13.03 39.218,13.056 40.081,13.056 20.091,21.158 21.209,21.158 17.196,21.184 19.177,21.184 16.154,21.209 18.263,21.209 22.301,21.209 19.177,21.996 18.212,22.047 17.196,22.073 16.129,22.098 22.352,22.25 17.196,22.86 18.186,22.86 19.202,22.86 16.129,22.885 22.073,23.495 16.129,23.649 17.145,23.649 18.161,23.649 19.177,23.649 20.193,23.698
  other v2: 35.077,21.717 37.338,21.742 36.144,21.768 36.195,22.936 35.077,22.987 37.363,22.987 35.027,24.206 36.144,24.232 36.17,25.476 35.001,25.527
VSP: J7.2 R42.1 R44.2 | length 13.2
  Top Layer w0.35: R44.2@73.101,29.083 74.549,27.635 74.549,22.073 J7.2@75.87,20.752 ; J7.2@75.295,20.752 ccw(c73.907,20.752) 74.888,21.733 ccw(c75.87,22.715) J7.2@75.87,21.327
  Top Layer w0.5: R44.2@73.076,29.032 R42.1@73.076,30.582
W: C18.2 J3.3 Q5.3 Q6.2 R28.1 R30.1 U6.6 | length 230.7
  Top Layer w0.5: 42.85,16.993 50.648,16.993 54.331,13.31 56.566,13.31 ; 50.698,21.73 ccw(c52.362,21.73) C18.2@51.186,20.553 ; U6.6@50.698,22.885 50.698,20.549 C18.2@51.003,20.244 47.828,20.244 ; C18.2@50.821,20.061 ccw(c50.38,19.621) 50.38,20.244 ccw(c50.38,20.867) C18.2@50.821,20.426 ; 56.33,13.31 ccw(c56.33,13.799) 56.676,13.453 ; 47.828,20.244 47.371,20.701 46.558,20.701 47.015,20.244 47.828,20.244
  Top Layer w2: 44.247,20.015 44.348,20.015 v2@45.568,21.234 ; v2@45.593,22.504 v2@45.593,22.581 ; v2@46.152,22.454 46.025,22.581 45.771,22.581 v2@45.593,22.581 ; 16.383,18.415 18.364,18.415 19.202,18.415 20.9,18.415 J3.3@20.985,18.415 ; 16.383,18.415 16.383,17.755 16.383,16.434 v1(16.535,16.281) 16.84,15.977 v1@17.399,15.977 ; 16.383,18.415 16.468,18.5 16.637,18.5 18.364,18.5 19.202,18.5 J3.3@20.9,18.5 ; v1@17.399,15.977 18.415,16.993 v1(20.244,16.993) 21.082,16.993 22.149,16.993 v1@22.407,16.993 ; v1@17.399,15.977 18.39,15.977 20.269,15.977 21.082,15.977 22.123,15.977 22.174,15.977 41.834,15.977 42.85,16.993 ; J3.3@20.9,18.5 J3.3@20.985,18.415 ; J3.3@20.9,18.5 23.952,18.5 ; J3.3@20.985,18.415 v1@22.407,16.993 ; J3.3@20.985,18.415 23.867,18.415 23.952,18.5 ; v1@22.407,16.993 42.85,16.993 ; 23.952,18.5 38.28,18.5 ; 38.28,18.5 44.221,24.441 ; 38.28,18.5 39.074,18.5 ; 39.074,18.5 v2@44.221,23.647 ; 39.074,18.5 41.309,18.5 41.792,18.983 ; 41.792,18.983 44.84,18.983 ; 41.792,18.983 44.221,21.412 ; 42.85,16.993 44.84,18.983 ; 44.221,21.412 45.39,22.581 v2@45.593,22.581 ; 44.221,21.412 v2@44.221,23.647 ; v2@44.221,23.647 44.221,24.441 ; 44.221,24.441 46.552,24.441 46.558,24.435 ; 44.221,24.441 44.494,24.714 46.558,24.714 46.558,24.435 ; 44.84,18.983 46.558,20.701 46.558,24.435 ; v2@45.593,22.581 45.593,22.682 45.593,23.825 45.593,24.384 45.542,24.435 46.558,24.435
  Bottom Layer w0.254: Q6.2@50.724,14.481 47.789,17.416 Q6.2@46.533,18.672 ; Q6.2@46.533,18.672 46.533,26.998 45.616,27.915 45.616,19.589 Q6.2@46.533,18.672
  Bottom Layer w0.5: 44.917,14.173 44.917,14.138 Q6.2@45.136,13.919 ; 46.888,21.234 47.219,21.565 47.269,21.615 47.396,21.615 47.396,21.19 48.102,20.484 48.102,17.729 47.789,17.416 47.789,17.007 Q6.2@50.724,14.072 ; 50.622,13.665 45.39,13.665 Q6.2@45.136,13.919 ; Q6.2@50.876,13.919 Q6.2@45.136,13.919 ; Q6.2@51.003,14.046 Q6.2@51.003,19.888
  Bottom Layer w0.508: v2@44.514,23.591 cw(c44.189,23.228) v2@44.587,22.947 ; v2@44.559,24.793 cw(c44.063,24.414) v2@44.585,24.069 ; Q5.3@44.907,28.372 44.907,26.755 45.314,26.349 v2@45.314,21.26 ; 47.219,26.949 47.219,21.565 47.219,21.368 R30.1@47.396,21.19
  other v1: 19.329,15.469 17.45,15.494 18.39,15.494 20.295,15.494 21.107,15.494 22.123,15.519 16.535,15.545 17.45,16.231 18.415,16.231 19.329,16.231 20.269,16.231 21.082,16.256 15.85,16.281 22.149,16.281 21.107,17.018 15.824,17.043 16.51,17.043 17.475,17.043 18.44,17.043 19.329,17.043 22.174,17.069 19.329,17.729 17.475,17.755 18.44,17.755 15.875,17.831 16.586,17.831 18.364,18.567 16.637,18.593 17.475,18.593 19.202,18.593 15.875,18.618
  other v2: 45.187,21.438 46.406,21.438 44.679,22.657 46.888,22.657 45.771,22.682 44.679,23.774 45.745,23.825 46.863,23.876 44.755,24.943 45.771,24.968 46.812,24.968
pads on no net: U5.8 U5.9 U5.23
copper on no net: | length 56.6
  Top Layer w0.35: 66.203,23.952 66.198,23.958 66.198,24.766 66.198,25.837 65.811,26.223 65.811,26.949 66.421,27.559 68.986,27.559 70.51,26.035 70.51,19.228 69.774,18.491 69.799,18.466
  Top Layer w0.5: v1@39.141,26.01 39.319,26.187 40.31,26.187 48.336,34.214 49.149,34.214 49.733,34.214 ; v1@48.641,26.467 50.165,26.467 51.968,24.663 51.968,22.885
  Bottom Layer w0.5: v1(39.141,26.137) 39.167,26.111 39.167,25.248 ; 39.446,22.911 39.671,22.686 39.671,22.458 ; 39.446,25.197 39.446,25.502 ; 39.671,21.565 39.671,22.458 ; 39.776,21.311 39.776,22.352 39.671,22.458 ; 41.224,27.711 41.224,26.916 40.691,26.383 40.691,24.486 39.167,22.962 39.671,22.458 ; 48.539,25.451 48.539,26.314 v1(48.641,26.416) ; 48.641,22.784 48.971,22.454 48.971,21.336 ; 48.793,22.784 49.818,23.809 49.818,26.544 50.216,26.941 50.216,27.915 49.737,27.436 49.737,26.463

## Polygon pours and split planes (outlines as drawn)
BAT on Bottom Layer "Top Layer-No Net" (hatched 90Degree grid 0.508 track 0.508, remove dead copper, pour order 50): 0,5.69 4.674,5.69 4.699,5.69 5.283,5.121 5.283,0.124 0.127,0.124 0,0
GND on Bottom Layer "Top Layer-No Net" (hatched 90Degree grid 0.508 track 0.508, remove dead copper, pour order 49): 5.131,7.855 6.782,6.213 6.782,0.176 18.059,0.176 18.415,-0.178 18.313,-0.077 18.313,13.589 5.41,13.589 5.359,13.64
GND on Bottom Layer "Top Layer-No Net" (hatched 90Degree grid 0.508 track 0.508, remove dead copper, pour order 48): 17.17,13.259 17.145,13.284 15.646,13.284 15.519,13.284 13.056,15.748 12.192,16.612 12.192,28.829 6.172,28.829 4.648,30.353 4.623,30.378 4.623,32.233 0.051,32.233 -0.051,32.131 -0.076,32.106 -0.076,7.569 6.756,7.569 10.262,4.064 10.795,3.531 18.186,3.531 18.186,13.259
5V on Bottom Layer "Top Layer-No Net" (hatched 90Degree grid 0.508 track 0.508, remove dead copper, pour order 44): 72.72,8.026 73.99,6.756 76.073,6.756 76.073,5.791 75.413,5.131 73.762,3.48 72.517,3.48
5V on Bottom Layer "Top Layer-No Net" (hatched 90Degree grid 0.508 track 0.508, remove dead copper, pour order 43): 77.267,7.569 77.267,4.699 73.101,0.533 73.025,0.457 69.698,0.457 69.698,0.889 76.429,7.62
BAT on Bottom Layer "Top Layer-No Net" (hatched 90Degree grid 0.508 track 0.508, remove dead copper, pour order 35): 8.92,34.064 11.203,36.167 25.754,36.167 26.306,36.675 26.557,36.906 48.006,36.906 48.006,31.037 47.981,31.013 27.911,31.013 8.971,31.013 7.967,31.013 7.365,31.568 7.29,31.637 7.29,33.024 7.29,34.226 8.971,35.774 9.472,36.236 11.778,36.236
NetC2_2 on Bottom Layer "Top Layer-No Net" (hatched 90Degree grid 0.508 track 0.508, remove dead copper, pour order 37): 27.889,28.631 27.889,28.854 27.889,29.522 27.915,29.546 27.686,29.769 15.824,29.769 15.824,25.219 15.9,25.145 26.111,25.145 27.153,25.145 27.203,25.095 27.203,25.985 27.203,26.035 27.889,26.703
NetC2_2 on Bottom Layer "Top Layer-No Net" (hatched 90Degree grid 0.508 track 0.508, remove dead copper, pour order 39): 24.257,25.019 24.257,15.691 24.257,14.796 26.137,12.905 26.441,12.598 32.156,12.598 32.156,19.729 31.801,20.087 27.838,20.087 27.838,21.087 27.535,21.392 27.153,21.777 27.153,25.019
V on Bottom Layer "Top Layer-No Net" (hatched 90Degree grid 0.508 track 0.508, remove dead copper, pour order 42): 15.9,24.105 22.022,24.105 22.428,23.633 22.606,23.426 22.606,20.625 15.926,20.625 15.9,20.654
W on Bottom Layer "Top Layer-No Net" (hatched 90Degree grid 0.508 track 0.508, remove dead copper, pour order 45): 15.773,19.533 22.53,19.533 22.581,19.484 22.581,15.291 16.434,15.291 15.773,15.921
V on Bottom Layer "Top Layer-No Net" (hatched 90Degree grid 0.508 track 0.508, remove dead copper, pour order 32): 34.722,28.067 35.408,28.753 35.738,28.753 37.592,28.753 37.643,28.702 37.643,25.578 37.643,22.403 38.43,21.615 38.532,21.514 38.532,18.898 38.532,17.145 41.605,14.072 41.605,13.157 34.976,13.157 34.95,13.132 34.9,13.183 34.9,21.184 34.9,27.889 34.773,28.016
W on Bottom Layer "Top Layer-No Net" (hatched 90Degree grid 0.508 track 0.508, remove dead copper, pour order 33): 47.219,26.949 47.193,26.975 47.193,28.575 44.425,28.575 44.399,28.55 44.399,23.368 44.399,12.878 51.181,12.878 51.181,17.405 48.102,20.484 47.219,21.368 47.219,26.238
GND on Bottom Layer "Top Layer-No Net" (hatched 90Degree grid 0.508 track 0.508, remove dead copper, pour order 38): 0.102,45 78,45 78,0 56.464,0 55.499,0 55.397,-0.102 55.296,0 55.296,19.329 55.296,19.761 54.153,20.904 54.051,21.006 24.486,21.006 23.241,21.006 12.294,31.953 9.728,34.519 5.258,34.519 5.258,29.794 4.47,29.007 3.835,29.642 0.254,29.642
V on Top Layer "Top Layer-No Net" (hatched 90Degree grid 0.508 track 0.508, remove dead copper, pour order 53): 42.847,13.183 37.363,13.183 37.363,11.788 37.413,11.753 37.439,11.735 44.399,11.735 44.399,12.092 43.172,12.968
NetC2_2 on Top Layer "Top Layer-No Net" (hatched 90Degree grid 0.508 track 0.508, remove dead copper, pour order 52): 32.563,13.335 25.044,13.335 24.867,13.209 24.867,11.227 32.512,11.227 32.563,11.263
BAT on Top Layer "Top Layer-No Net" (hatched 90Degree grid 0.508 track 0.508, remove dead copper, pour order 51): 11.913,15.9 18.39,9.423 18.39,0 0.229,0 -0.076,-0.305 0.127,-0.102 0.127,11.659
BAT on Top Layer "Top Layer-No Net" (hatched 90Degree grid 0.508 track 0.508, remove dead copper, pour order 36): 6.132,32.749 6.808,31.84 6.808,28.832 6.808,28.202 4.865,25.59 2.489,22.396 2.489,-0.152 11.908,-0.152 12.012,-0.012 12.116,0.127 12.116,34.241 6.149,34.241 6.132,34.265
V on Top Layer "Top Layer-No Net" (hatched 90Degree grid 0.508 track 0.508, remove dead copper, pour order 40): 22.606,23.673 22.581,23.649 15.875,23.649 15.875,21.074 15.9,21.05 16.002,20.955 23.114,20.955
NetC2_2 on Top Layer "Top Layer-No Net" (hatched 90Degree grid 0.508 track 0.508, remove dead copper, pour order 41): 25.679,27.82 25.679,28.582 25.705,28.6 15.875,28.6 15.875,25.163 16.002,25.07 26.34,25.07 26.721,25.07 27.127,25.367 27.127,27.857
NetC3_1 on Top Layer "Top Layer-No Net" (hatched 90Degree grid 0.508 track 0.508, remove dead copper, pour order 46): 24.638,7.095 24.696,7.137 48.993,7.137 48.993,0.948 49.022,0.927 48.935,0.864 24.638,0.864
NetC3_1 on Top Layer "Top Layer-No Net" (hatched 90Degree grid 0.508 track 0.508, remove dead copper, pour order 47): 25.273,7.391 21.692,7.391 21.692,0.178 25.062,0.178 25.115,0.127
GND on Top Layer "Top Layer-No Net" (hatched 90Degree grid 0.508 track 0.508, remove dead copper, pour order 34): 0,45 78,45 78,0 52.476,0 52.324,-0.152 52.324,28.854 49.276,25.806 0.152,25.806 0.152,44.848 0,45
NetC3_1 on Top Solder "Top Layer-No Net" (hatched 90Degree grid 0.508 track 0.508, remove dead copper): 21.895,6.579 48.409,6.579 48.641,6.3 48.641,1.118 22.127,1.118 21.924,1.361
V on Top Solder "Top Layer-No Net" (hatched 90Degree grid 0.508 track 0.508, remove dead copper): 16.106,23.434 33.206,23.434 35.375,25.42 35.77,25.781 37.77,25.781 37.77,21.241 37.46,20.958 37.263,20.777 16.078,20.777
NetC2_2 on Top Solder "Top Layer-No Net" (hatched 90Degree grid 0.508 track 0.508, remove dead copper): 25.197,28.296 16.205,28.296 16.205,25.34 16.231,25.316 16.332,25.222 26.848,25.222 26.848,27.357 25.857,28.272
W on Top Solder "Top Layer-No Net" (hatched 90Degree grid 0.508 track 0.508, remove dead copper): 16.281,18.542 37.694,18.542 40.183,21.031 43.917,24.765 46.812,24.765 47.066,24.511 47.066,23.851 47.066,20.574 45.39,18.898 41.961,15.469 38.837,15.469 16.662,15.469 16.256,15.875
NetC3_1 on Bottom Solder "Top Layer-No Net" (hatched 90Degree grid 0.508 track 0.508, remove dead copper): 23.856,7.239 23.887,7.264 47.752,7.264 47.752,2.692 47.355,2.362 47.202,2.235 23.673,2.235
W on Bottom Solder "Top Layer-No Net" (hatched 90Degree grid 0.508 track 0.508, remove dead copper): 16.128,19.262 16.279,19.406 22.555,19.406 22.555,15.584 22.43,15.464 22.354,15.392 16.58,15.392 16.58,15.464 16.078,15.942
V on Bottom Solder "Top Layer-No Net" (hatched 90Degree grid 0.508 track 0.508, remove dead copper): 15.951,23.8 21.514,23.8 21.539,23.825 22.225,23.139 22.225,21.031 15.951,21.031
V on Bottom Solder "Top Layer-No Net" (hatched 90Degree grid 0.508 track 0.508, remove dead copper): 36.283,28.473 35.783,28.473 35.197,27.824 35.154,27.776 35.154,20.395 36.457,20.395 36.478,20.371 36.652,20.563 36.652,28.473

## Keep-outs
Keep-Out Layer:
  circle w0.2: c8.95,37.45 r1.55
  circle w0.2: c68.85,37.45 r1.55
  circle w0.2: c8.95,7.55 r1.55
  circle w0.2: c68.85,7.55 r1.55
  lines w0.254: 0,0 78,0 78,45 0,45 0,0

## Other copper
Top Layer:
  rectangle net BAT: 14.529,11.481 21.057,12.725
  region net BAT: 16.244,9.953 22.218,9.864 22.242,11.49 16.268,11.579
  rectangle net NetC7_2: 68.872,41.326 70.383,42.532
  rectangle net 5V: 56.109,38.405 57.296,39.421
Bottom Layer:
  rectangle net BAT: 41.859,37.191 50.698,38.278
  text "Note:" at 0,-1.499 h1.52
  text "The components, C14, C16 and C19, are originally reserved for test and now not necessary in this application solution." at 0,-3.023 h1.52
  text "There should be no components on the locations for C14, C16 and C19." at 0,-4.547 h1.52

## Silkscreen, mask and mechanical layers (free items; w line width, h text height)
Top Overlay:
  circle w0.127: c8.95,7.55 r3.15
  circle w0.127: c68.85,7.55 r3.15
  circle w0.127: c68.85,37.45 r3.15
  circle w0.127: c8.95,37.45 r3.15
  lines w0.254: 27.356,36.22 27.382,36.194 31.103,36.194
  text "HT66FM5440" at 32.283,42.647 h1.5
  text "GND" at 6.045,41.631 h1.5
  text "A" at 15.164,26.238 h1.5 r90
  text "B" at 15.189,22.225 h1.5 r90
  text "C" at 15.189,18.11 h1.5 r90
  text "VIN" at 6.502,1.372 h1.5
  text "GND" at 59.182,0.66 h0.6
  text "SCL" at 64.237,0.635 h0.6
  text "+5V" at 61.62,0.61 h0.6
  text "SDA" at 66.827,0.61 h0.6
Bottom Overlay:
  lines w0.254: 25,8 25,37.2 49,37.2 49,8 25,8
  text "PB1" at 65.456,43.739 h0.8
  text "PB0" at 60.046,43.713 h0.8
  text "PB2" at 62.763,43.713 h0.8
  text "HB" at 74.346,38.989 h0.8
  text "HA" at 74.422,36.449 h0.8
  text "HC" at 74.447,33.757 h0.8
  text "HS" at 74.625,31.445 h0.8
  text "GND" at 74.397,28.829 h0.8
  text "A" at 14.021,26.289 h1.5 r270
  text "5V" at 74.219,25.552 h0.8
  text "GND" at 74.651,23.038 h0.8
  text "B" at 13.767,22.123 h1.5 r270
  text "CLK/VSP" at 74.752,20.498 h0.8
  text "C" at 13.767,18.161 h1.5 r270
  text "FG" at 74.447,17.704 h0.8
  text "CW/CCW" at 74.244,13.995 h0.8
  text "GND" at 74.168,11.43 h0.8
  text "BREAK" at 74.219,9.017 h0.8
Top Solder:
  lines w0.5: 15.951,29.083 22.911,29.083 23.495,28.499 23.495,28.372 ; 16.027,18.313 16.027,18.771 16.332,19.075 38.075,19.075 ; 16.106,23.434 16.447,23.774 32.563,23.774 34.569,25.781 35.77,25.781 ; 16.278,18.161 16.786,18.669 37.998,18.669 ; 16.332,25.222 16.104,25.451 16.104,28.626 16.205,28.727 23.368,28.727 23.749,28.346 23.749,28.296 ; 31.471,23.434 32.705,23.434 35.052,25.781 35.941,25.781 ; 26.797,27.404 27.181,27.404 27.178,27.402 27.178,25.197 27.153,25.171 27.508,25.171 27.508,27.381 27.485,27.404 26.797,27.404
Bottom Solder:
  rectangle: 15.875,25.146 24.867,28.88
  rectangle: 11.024,31.013 26.848,36.627
  rectangle: 24.308,14.884 26.594,25.349
  rectangle: 35.839,20.156 37.77,28.626
  rectangle: 44.272,20.066 47.244,28.626
  lines w0.254: 22.987,25.044 22.987,24.994 24.562,23.419 ; 23.52,25.298 24.613,24.206 24.613,23.876 23.52,24.968 23.241,24.968 23.317,24.968 24.689,23.597 ; 24.943,15.011 24.943,14.986 26.01,13.919 ; 25.222,14.808 25.832,14.808 ; 25.654,14.529 25.832,14.707 25.832,14.808 ; 26.213,20.777 26.213,20.726 27.076,19.863 ; 26.543,13.64 25.959,13.64 ; 31.699,13.538 26.34,13.538 25.959,13.538 24.486,15.011 24.587,15.011 25.959,13.64 ; 25.451,14.961 25.984,14.961 ; 25.451,14.961 25.451,14.732 25.832,14.351 25.832,14.808 ; 25.451,14.961 25.984,14.961 ; 25.832,14.808 25.984,14.961 ; 25.959,13.64 26.01,13.691 26.01,13.919 ; 25.984,14.961 26.01,14.935 26.01,13.919
  lines w0.5: 16.205,29.312 27.203,29.312 27.559,28.956 ; 19.507,28.905 21.819,28.905 21.869,28.956 27.559,28.956 ; 23.978,25.095 24.613,24.46 24.613,24.409 ; 24.066,24.422 24.066,24.575 ; 24.994,25.121 24.994,27.051 25.171,27.229 ; 25.044,25.756 26.035,25.756 ; 25.197,28.219 25.298,28.321 26.111,28.321 ; 25.984,27.686 26.035,27.686 ; 26.137,25.425 26.289,25.578 26.289,27.432 26.035,27.686 ; 26.289,28.727 26.289,27.94 26.035,27.686 ; 26.619,26.518 26.619,25.959 27,25.578 27,20.574 27.584,19.99 ; 26.67,24.816 26.67,19.939 26.721,19.888 ; 26.924,27.737 26.873,27.686 26.035,27.686 ; 27.559,28.423 27.559,28.956 ; 35.916,21.311 35.331,20.726 35.331,13.691 35.255,13.614 34.95,13.614 34.925,13.64 34.925,27.813 34.925,28.092 35.662,28.829 37.541,28.829 37.516,28.804 37.516,28.169 ; 37.389,25.679 37.389,25.552 37.846,25.095 37.846,21.514 ; 37.719,21.158 37.719,20.574 37.922,20.371 ; 37.973,21.209 37.973,20.549 38.303,20.218 ; 38.633,20.269 38.252,20.65 38.252,21.158 38.252,21.031 39.167,20.117 39.167,20.041 ; 44.577,28.296 44.45,28.169 44.45,13.487 44.679,13.259 51.105,13.259 51.181,13.335 51.181,13.64 44.856,13.64 44.856,20.345

## Text inside footprints (layer, text, board x,y; h text height)
C10: Top Overlay "+" at 26.312,40.877 h1.3
C11: Top Overlay "+" at 59.814,38.363 h1.3